# Altium PCB SiliconeSubstance.PcbDoc
Units mm, origin at the board's own origin, x right, y up, seen from the top; angles counter-clockwise.
Board outline 53.34 x 68.58 mm, 2 copper layers (Top Layer, Bottom Layer); 33 components, 38 nets, 155 pads, 13 vias.
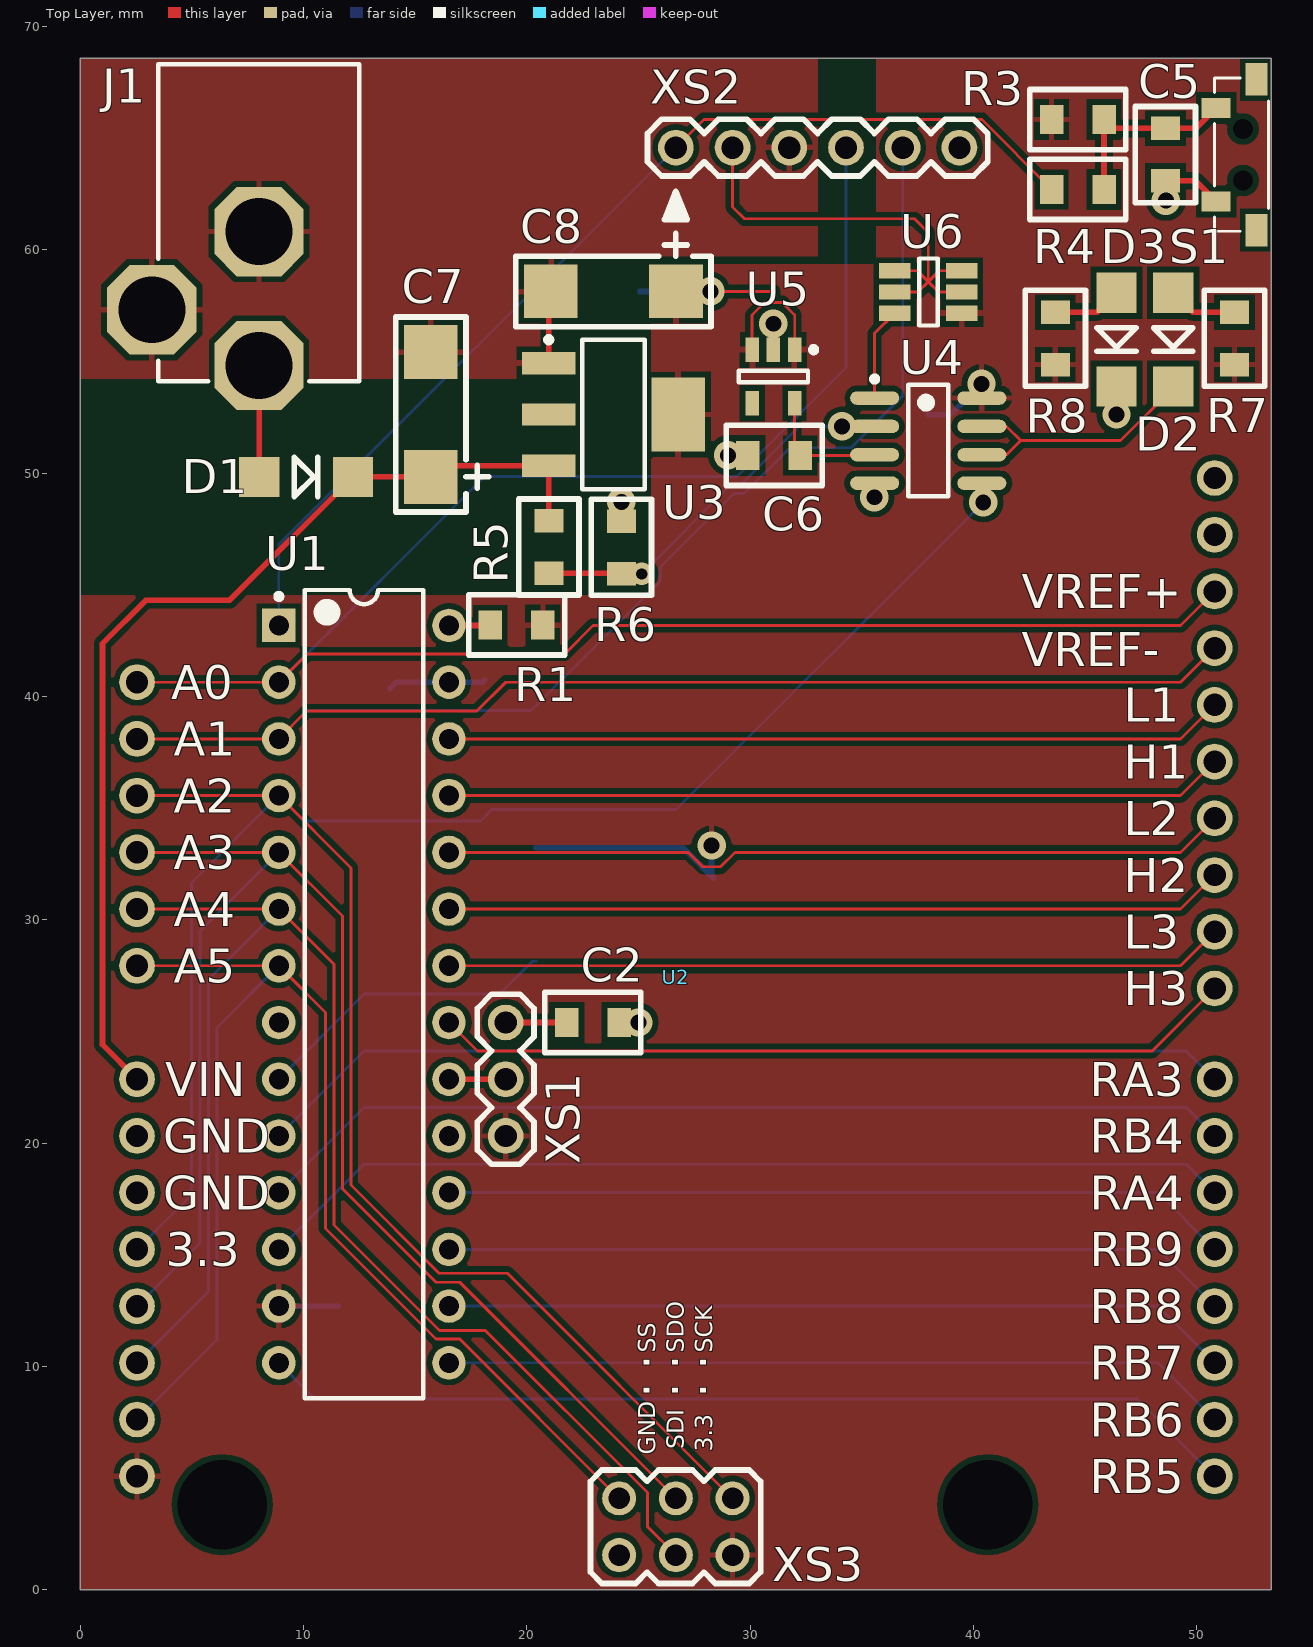
[diagram p0: Top Layer view]
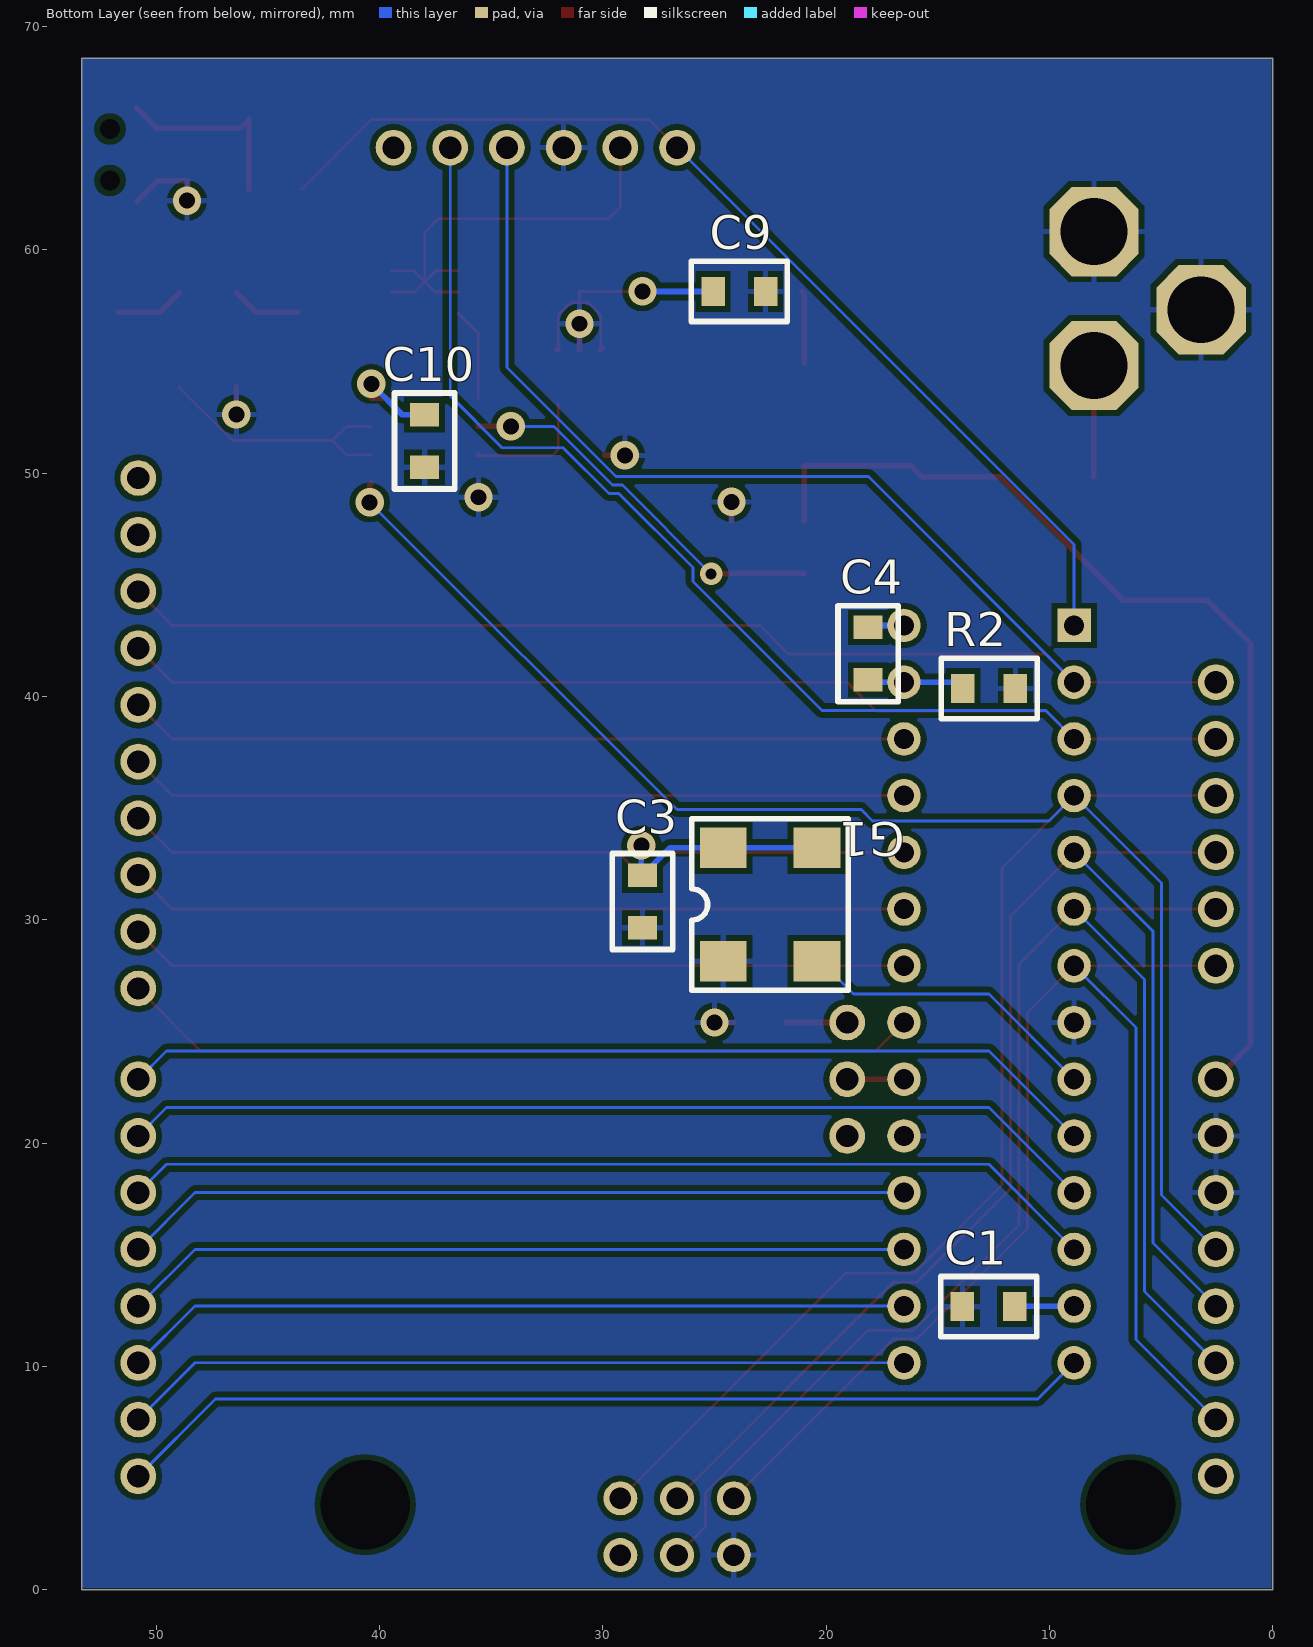
[diagram p1: Bottom Layer view, seen from below]

## Layer stack, top to bottom
Top Solder: solder mask 0.0102, Solder Resist, Dk 3.5
Top Layer: signal copper 0.0356
Dielectric 1: dielectric 0.32, FR-4, Dk 4.8
Bottom Layer: signal copper 0.0356
Bottom Solder: solder mask 0.0102, Solder Resist, Dk 3.5

## Board outline
0,0 53.34,0 53.34,68.58 0,68.58

## Design rules (kind name [scope] priority, off if disabled: settings)
Clearance [All] p1: gap=0.254
HoleSize [All] p1: absolutevalues=TRUE maxlimit=4 minlimit=0.025 maxpercent=80.000 minpercent=20.000
PolygonConnect [All] p1: connectstyle=Relief reliefconductorwidth=0.254 reliefentries=4 polygonreliefangle="90 Angle" airgapwidth=0.254
RoutingVias [All] p1: holewidth=0.711 width=1.27 viastyle="Through Hole" minholewidth=0.711 minwidth=1.27 maxholewidth=0.711 maxwidth=1.27
SolderMaskExpansion [All] p1: expansion=0.102
Width [All] p1: maxlimit=0.254 minlimit=0.127 preferedwidth=0.254
29 further rules are at their usual default settings.

## Classes and differential pairs
component class Sheet0: C1 C2 C3 C4 C5 G1 R1 R2 R3 R4 S1 U1 U2 XS1 XS2 XS3
component class Sheet1: C6 C7 C8 C9 C10 D1 D2 D3 J1 R5 R6 R7 R8 U3 U4 U5 U6

## Components (designator, comment, footprint, x,y, rotation, side; value= is the part's Value field where it differs from the comment)
C1 "Cap" 0805 13.894,12.675 r180 bottom
C2 "Cap" 0805 24.13,25.4 r180 top
C3 "Cap" 0805 28.219,29.642 r90 bottom
C4 "Cap" 0805 18.11,40.742 r90 bottom
C5 "Cap" 0805 48.59,63.094 r90 top
C6 "Cap" 0805 29.896,50.8 r0 top
C7 "CapPol" "CASE C" 15.697,52.629 r90 top
C8 "CapPol" "CASE C" 23.876,58.141 r180 top
C9 "Cap" 0805 22.708,58.141 r0 bottom
C10 "Cap" 0805 37.973,50.267 r90 bottom
D1 "US1x" "D0-214AC (SMA)" 10.109,49.835 r0 top
D2 "US1x" "D0-214AC (SMA)" 48.946,55.982 r270 top
D3 "US1x" "D0-214AC (SMA)" 46.406,55.982 r270 top
G1 "SG-8002" SMD7050 22.504,30.683 r270 bottom
J1 "PWR2.5" KLD-0202 8,68.32 r270 top locked
R1 "Res" 0805 18.364,43.205 r0 top
R2 "Res" 0805 13.868,40.361 r180 bottom
R3 "Res" 0805 45.847,65.837 r180 top
R4 "Res" 0805 43.497,62.713 r0 top
R5 "Res" 0805 20.98,45.517 r90 top
R6 "Res" 0805 24.232,47.854 r270 top
R7 "Res" 0805 51.689,54.864 r90 top
R8 "Res" 0805 43.663,54.864 r90 top
S1 "IT-1188E" IT-1188E 52.07,64.262 r90 top
U1 "DSPIC33FJ12MC202-I/SP" SPDIP300-SP28 12.7,26.67 r0 top locked
U2 "Applino N1" N1 2.54,40.64 r0 top locked
U3 "LM1117IMPX-3.3/NOPB" MP04A_N 23.876,52.629 r0 top
U4 "LMV358M" M08A_N 37.973,51.46 r0 top
U5 "LP2985-2.5DBVR" TI-DBV5_N 31.039,54.331 r270 top
U6 "IRLMS6702PbF" SuperSOT-6 37.973,58.115 r0 top
XS1 "PLS-3" PLS-3 19.05,20.32 r90 top locked
XS2 "PLS-6" PLS-6 26.67,64.58 r0 top locked
XS3 "PBD-6" PBD-6 26.67,2.819 r270 top

## Footprints (in the part's own frame and the unit in brackets; to place one, negate y for a bottom-side part, rotate by r counter-clockwise, add the part's x,y. Pads: shape width x height; smd on the part's side, far side on the other; paste and mask are expansions set on the pad)
0805 [mm]
  rect 1.05x1.3 smd: 1(0,0) 2(2.35,0)
  silkscreen extent -0.97,-1.35 3.32,1.35
"CASE C" [mm]
  rect 2.4x2.4 smd: 1(-2.8,0) 2(2.8,0)
  silkscreen extent -4.37,-2.59 4.37,1.57
"D0-214AC (SMA)" [mm]
  rect 1.8x1.8 smd: 1(-2.1,0) 2(2.1,0)
  silkscreen extent -0.52,-0.87 0.53,0.87
IT-1188E [mm]
  rect 0.9x1.3 smd: 1(-2.1,1.2) 2(2.1,1.2)
  rect 1.45x1 smd: 3(-3.375,-0.6) 4(3.375,-0.6)
  round 0 hole 0.9: 5(-1.15,0) 6(1.15,0)
  silkscreen extent -3.43,-1.14 3.43,1.27, body extent -3.9,-2.22 3.9,1.38, height 3.5
KLD-0202 [mm] "DC Power Jack, 2.5mm, KLD Series, PCB Mount"
  oct 4x4 hole 3: 1(13.5,0) 2(7.5,0) 3(11,-4.8)
  silkscreen extent 0,-4.5 14.2,4.5
M08A_N [mm] "SOIC, 8-Leads, Body 4.9x3.9mm, Pitch 1.27mm, IPC Medium Density"
  oval 2.2x0.6 smd: 1(-2.4,1.905) 2(-2.4,0.635) 3(-2.4,-0.635) 4(-2.4,-1.905) 5(2.4,-1.905) 6(2.4,-0.635) 7(2.4,0.635) 8(2.4,1.905)
  silkscreen extent -2.52,-2.5 0.9,2.88, body extent -2,-2.5 2,2.5, height 1.75
MP04A_N [mm] "SOT223, 4-Leads, Body 6.5x3.5mm, Pitch 2.3mm, Lead Span 7mm, IPC Medium Density"
  rect 2.4x1 smd: 1(-2.9,2.3) 2(-2.9,0) 3(-2.9,-2.3)
  rect 2.4x3.3 smd: 4(2.9,0)
  silkscreen extent -3.02,-3.35 1.4,3.47, body extent -1.86,-3.35 1.86,3.35, height 1.8
N1 [mm]
  round 1.6 hole 1: 1(0,0) 2(0,-2.54) 3(0,-5.08) 4(0,-7.62) 5(0,-10.16) 6(0,-12.7) 7(0,-17.78) 8(0,-20.32) 9(0,-22.86) 10(0,-25.4) 11(0,-27.94) 12(0,-30.48) 13(0,-33.02) 14(0,-35.56) 15(48.26,-35.56) 16(48.26,-33.02) 17(48.26,-30.48) 18(48.26,-27.94) 19(48.26,-25.4) 20(48.26,-22.86) 21(48.26,-20.32) 22(48.26,-17.78) 23(48.26,-13.716) 24(48.26,-11.176) 25(48.26,-8.636) 26(48.26,-6.096) 27(48.26,-3.556) 28(48.26,-1.016) 29(48.26,1.524) 30(48.26,4.064) 31(48.26,6.604) 32(48.26,9.144)
PBD-6 [mil]
  round 60 hole 37.99: 1(-50,100) 2(50,100) 3(-50,0) 4(50,0) 5(-50,-100) 6(50,-100)
  silkscreen extent -100,-151 100,149
PLS-3 [mm]
  round 1.6 hole 1: 1(0,0) 2(2.54,0) 3(5.08,0)
  silkscreen extent -1.27,-1.27 6.35,1.27
PLS-6 [mm]
  round 1.6 hole 1: 1(0,0) 2(2.54,0) 3(5.08,0) 4(7.62,0) 5(10.16,0) 6(12.7,0)
  silkscreen extent -1.27,-3.22 13.97,1.27
SMD7050 [mm]
  rect 1.8x2.1 smd: 1(-2.54,-2.1) 2(2.54,-2.1) 3(2.54,2.1) 4(-2.54,2.1)
  silkscreen extent -3.85,-3.5 3.84,3.5
SPDIP300-SP28 [mm] "DIP, 28-Leads, Row Spacing 7.62mm, Pitch 2.54mm, Body 34.9x6.8mm"
  rect 1.5x1.5 hole 0.9: 1(-3.81,16.51)
  round 1.5 hole 0.9: 2(-3.81,13.97) 3(-3.81,11.43) 4(-3.81,8.89) 5(-3.81,6.35) 6(-3.81,3.81) 7(-3.81,1.27) 8(-3.81,-1.27) 9(-3.81,-3.81) 10(-3.81,-6.35) 11(-3.81,-8.89) 12(-3.81,-11.43) 13(-3.81,-13.97) 14(-3.81,-16.51) 15(3.81,-16.51) 16(3.81,-13.97) 17(3.81,-11.43) 18(3.81,-8.89) 19(3.81,-6.35) 20(3.81,-3.81) 21(3.81,-1.27) 22(3.81,1.27) 23(3.81,3.81) 24(3.81,6.35) 25(3.81,8.89) 26(3.81,11.43) 27(3.81,13.97) 28(3.81,16.51)
  silkscreen extent -3.93,-18.1 2.65,18.1, body extent -3.55,-18.1 3.55,18.1, height 5.33
SuperSOT-6 [mm]
  rect 1.4x0.69 smd: 1(-1.5,0.95) 2(-1.5,0) 3(-1.5,-0.95) 4(1.5,-0.95) 5(1.5,0) 6(1.5,0.95)
  silkscreen extent -0.4,-1.5 0.43,1.5, body extent -0.95,-1.6 0.95,1.6, height 2
TI-DBV5_N [mm] "SOT23, 5-Leads, Body 2.9x1.6mm, Pitch 0.95mm, IPC Medium Density"
  rect 1.1x0.6 smd: 1(-1.2,0.95) 2(-1.2,0) 3(-1.2,-0.95) 4(1.2,-0.95) 5(1.2,0.95)
  silkscreen extent -1.32,-1.55 0.25,1.93, body extent -0.87,-1.52 0.87,1.53, height 1.45

## Part data
C7 C8: "Polarized Capacitor (Radial)"
D1 D2 D3: "Ultrafast Rectifier"
J1: "Low Voltage Power Supply Connector"
U1: "High-Performance 16-bit Digital Signal Controller, 12 KB Flash, 1 KB RAM, 28-Pin SPDIP, Industrial Temperature"
U3: "800mA Low-Dropout Linear Regulator, 4-pin SOT-223, Pb-Free"
U4: "General Purpose, Low Voltage, Rail-to-Rail Output Operational Amplifiers, 8-pin Narrow SOIC"
U5: library part LP2985-10DBVR, "Single Output Low Noise LDO, 150 mA, Fixed 10 V Output, 2.2 to 16 V Input, with Low IQ, 5-pin SOT-23 (DBV), -40 to 125 degC, Green (RoHS & no Sb/Br)"

## Free pads (board coordinates)
  round 3 hole 4: 4(6.35,3.81) 5(40.64,3.81)

## Via types
v1: diameter 1.27, hole 0.711, Top Layer to Bottom Layer, 12 vias
v2: diameter 1, hole 0.5, Top Layer to Bottom Layer, 1 vias

## Nets (pads, with @x,y where several pads share a name; then routed paths per layer and width w, separated by ;. In a path a pad name is that pad's centre, name@x,y a point inside that pad or via, vN(x,y) a via of type N, cw(c..) or ccw(c..) an arc to the next point about the centre after c; other vN are vias at no path point)
+2.5V: C6.2 U4.3 U5.5 | length 5.8
  Top Layer w0.127: U5.5 31.989,51.057 C6.2 U4.3@35.548,50.8
  Top Layer w0.254: U4.3@35.548,50.8 U4.3
+3.3V: C1.2 C3.2 C8.1 C9.2 C10.2 G1.1 G1.4 R1.2 R3.2 R7.1 R8.1 U1.13 U2.14 U3.4 U4.8 U5.1 U5.3 U6.4 XS1.1 XS3.2 | length 29
  Top Layer w0.127: v1(28.219,58.141) 31.039,58.141 31.039,57.709 ; U5.3 30.086,55.533 30.086,57.087 30.644,57.645 31.433,57.645 31.991,57.087 31.991,55.533 U5.1
  Top Layer w0.254: U5.3@30.023,55.597 U5.3@30.086,55.533 ; U5.1 U5.1@32.055,55.531 ; U4.8@39.694,53.365 U4.8@40.361,53.365 ; v1(40.361,54) 40.373,53.988 U4.8
  Bottom Layer w0.254: U1.13 C1.2@11.544,12.7 ; G1.4 G1.1 26.988,33.223 28.346,31.865 28.372,31.89 28.27,31.992 v1(28.27,33.325) ; C9.2 v1(28.219,58.141) ; C10.2 38.977,52.617 v1(40.361,54)
+9.0V: D1.1 J1.1 | length 5
  Top Layer w0.254: J1.1 8.009,54.811 D1.1
GND: C1.1 C2.1 C3.1 C5.1 C6.1 C7.2 C8.2 C9.1 C10.1 D3.2 G1.2 J1.2 J1.3 R2.2 R6.1 S1.1 U1.8 U1.19 U2.8 U2.9 U3.1 U4.4 U5.2 XS2.3 XS3.6 | length 13.8
  Top Layer w0.254: J1.2@6.7,60.82 J1.2 J1.2@8.024,60.796 ; U3.1 20.976,58.041 C8.2 ; C2.1 v1(24.994,25.4) ; R6.1 v1(24.232,48.717) ; v1(29.007,50.8) C6.1 ; U5.2 v1(31.039,56.693) ; v1(35.56,48.92) 35.573,48.933 U4.4 ; v1(46.406,52.629) D3.2 ; v1(48.616,62.205) 48.59,62.23 C5.1 49.938,63.094 S1.1
NetC2_2: C2.2 XS1.3 | length 2.7
  Top Layer w0.254: XS1.3 C2.2
NetC4_1: C4.1 R2.1 U1.27 | length 4.4
  Bottom Layer w0.254: R2.1 14.148,40.64 U1.27 18.009,40.64 C4.1
NetC4_2: C4.2 R1.1 U1.28 | length 3.5
  Top Layer w0.254: U1.28 18.339,43.18 R1.1
  Bottom Layer w0.254: U1.28 18.022,43.18 C4.2
NetC5_2: C5.2 R3.1 R4.2 S1.2 | length 8.7
  Top Layer w0.254: R4.2 R3.1 46.24,65.444 C5.2 49.952,65.444 S1.2
NetD2_1: D2.1 R7.2 | length 3.1
  Top Layer w0.254: D2.1 49.813,57.214 R7.2
NetD2_2: D2.2 U4.6 U4.7 | length 11.9
  Top Layer w0.127: U4.6 41.478,50.825 42.113,51.46 ; U4.7 41.478,52.095 42.113,51.46 ; D2.2 48.946,53.822 46.584,51.46 42.113,51.46
NetD3_1: D3.1 R8.2 | length 3.1
  Top Layer w0.254: R8.2 45.538,57.214 D3.1
NetG1_3: G1.3 U1.9 | length 13.7
  Bottom Layer w0.127: U1.9 12.7,26.67 18.771,26.67 20.244,28.143 G1.3
NetR4_1: R4.1 U1.1 XS2.1 | length 47.4
  Top Layer w0.127: XS2.1 27.927,65.837 40.373,65.837 R4.1
  Bottom Layer w0.127: U1.1 8.89,46.8 XS2.1
NetR5_1: R5.1 R6.2 U4.2 | length 17.3
  Top Layer w0.254: R5.1 24.218,45.517 R6.2 25.134,45.504 v2(25.146,45.491) ; v1(34.112,52.095) U4.2
  Bottom Layer w0.127: v2(25.146,45.491) 29.121,49.466 29.559,49.466 32.188,52.095 v1(34.112,52.095)
NetU1_2: U1.2 U2.1 U2.30 XS2.4 | length 91
  Top Layer w0.127: U2.1 U1.2 10.16,41.91 21.692,41.91 22.962,43.18 49.276,43.18 U2.30
  Bottom Layer w0.127: U1.2 18.098,49.847 29.401,49.847 34.29,54.736 XS2.4
NetU1_3: U1.3 U2.2 U2.29 XS2.5 | length 95.8
  Top Layer w0.127: U2.2 U1.3 10.135,39.345 17.755,39.345 19.05,40.64 49.276,40.64 U2.29 U2.29@50.8,42.112
  Bottom Layer w0.127: U1.3 10.16,39.37 20.181,39.37 25.964,45.153 25.964,45.77 29.279,49.085 29.717,49.085 31.774,51.143 34.507,51.143 36.83,53.466 XS2.5
NetU1_4: U1.4 U2.3 U2.10 U4.5 XS3.1 | length 109.8
  Top Layer w0.127: U2.3 U1.4 12.124,32.326 12.124,18.116 16.068,14.172 19.127,14.172 XS3.1
  Top Layer w0.254: U4.5 40.437,49.492 v1(40.437,48.692)
  Bottom Layer w0.127: U2.10 4.978,17.678 4.978,31.648 U1.4 10.021,34.429 17.919,34.429 18.422,34.932 26.677,34.932 v1(40.437,48.692)
NetU1_5: U1.5 U2.4 U2.11 XS3.3 | length 66.2
  Top Layer w0.127: U2.4 U1.5 11.743,30.167 11.743,17.959 15.934,13.768 16.992,13.768 XS3.3
  Bottom Layer w0.127: U2.11 5.359,15.519 5.359,29.489 U1.5
NetU1_6: U1.6 U2.5 U2.12 XS3.4 | length 66.8
  Top Layer w0.127: U2.5 U1.6 11.362,28.008 11.362,16.338 16.092,11.609 18.138,11.609 25.4,4.346 25.4,2.819 XS3.4
  Bottom Layer w0.127: U2.12 5.74,13.36 5.74,27.33 U1.6
NetU1_7: U1.7 U2.6 U2.13 XS3.5 | length 60.1
  Top Layer w0.127: U2.6 U1.7 10.981,25.849 10.981,16.181 15.934,11.228 16.992,11.228 XS3.5
  Bottom Layer w0.127: U2.13 6.121,11.201 6.121,25.171 U1.7
NetU1_10: U1.10 U2.22 | length 44
  Bottom Layer w0.127: U1.10 12.7,24.13 49.53,24.13 U2.22
NetU1_11: U1.11 U2.21 | length 44
  Bottom Layer w0.127: U1.11 12.7,21.59 49.53,21.59 U2.21
NetU1_12: U1.12 U2.20 | length 44
  Bottom Layer w0.127: U1.12 12.7,19.05 49.53,19.05 U2.20
NetU1_14: U1.14 U2.15 | length 44
  Bottom Layer w0.127: U1.14 10.516,8.534 47.346,8.534 U2.15
NetU1_15: U1.15 U2.16 | length 35.3
  Bottom Layer w0.127: U1.15 48.26,10.16 U2.16
NetU1_16: U1.16 U2.17 | length 35.3
  Bottom Layer w0.127: U1.16 48.26,12.7 U2.17
NetU1_17: U1.17 U2.18 | length 35.3
  Bottom Layer w0.127: U1.17 48.26,15.24 U2.18
NetU1_18: U1.18 U2.19 | length 35.3
  Bottom Layer w0.127: U1.18 48.26,17.78 U2.19
NetU1_20: U1.20 XS1.2 | length 2.5
  Top Layer w0.254: U1.20 XS1.2
NetU1_21: U1.21 U2.23 | length 36
  Top Layer w0.127: U1.21 17.78,24.13 48.006,24.13 U2.23
NetU1_22: U1.22 U2.24 | length 34.9
  Top Layer w0.127: U1.22 49.276,27.94 U2.24
NetU1_23: U1.23 U2.25 | length 34.9
  Top Layer w0.127: U1.23 49.276,30.48 U2.25
NetU1_24: U1.24 U2.26 | length 35.5
  Top Layer w0.127: U1.24 27.228,33.02 27.876,32.372 28.665,32.372 29.312,33.02 49.276,33.02 U2.26
NetU1_25: U1.25 U2.27 | length 34.9
  Top Layer w0.127: U1.25 49.276,35.56 U2.27
NetU1_26: U1.26 U2.28 | length 34.9
  Top Layer w0.127: U1.26 49.276,38.1 U2.28
NetU4_1: U4.1 U6.3 | length 4.2
  Top Layer w0.127: U4.1 35.573,56.265 U6.3
NetU6_1: U6.1 U6.2 U6.5 U6.6 XS2.2 | length 20.9
  Top Layer w0.127: XS2.2@29.21,64.287 29.21,61.925 29.743,61.392 37.363,61.392 37.973,60.782 37.973,58.572 ; U6.2 37.516,58.115 37.973,58.572 ; U6.1 37.48,59.065 37.973,58.572 ; U6.5 38.43,58.115 37.973,58.572 ; U6.6 38.466,59.065 37.973,58.572
  Top Layer w0.254: XS2.2@29.21,64.287 XS2.2
VIN: C7.1 D1.2 R5.2 U2.7 U3.3 | length 45.9
  Top Layer w0.254: U2.7 0.991,24.409 0.991,42.367 2.934,44.311 6.685,44.311 D1.2 15.691,49.835 C7.1 16.197,50.329 U3.3 20.976,47.871 R5.2
pads on no net: S1.3 S1.4 S1.5 S1.6 U2.31 U2.32 U3.2 U5.4 XS2.6

## Polygon pours and split planes (outlines as drawn)
GND on Top Layer "TOPGND" (solid, pour order 0): 0,68.58 0,54.229 3.607,54.229 10.287,54.229 14.605,54.229 22.276,54.229 22.276,55.855 22.276,59.715 33.02,59.715 33.02,68.58
+3.3V on Top Layer "TOP+3.3V" (solid, pour order 4): 25.578,50.978 25.578,59.334 25.603,59.36 35.636,59.36 35.636,68.58 53.34,68.58 53.34,48.412 53.34,48.489 53.34,0 0,0 0,44.526 25.603,44.526
GND on Bottom Layer "BTN+3.3V" (solid, pour order 2): 0,68.58 0.051,68.529 0.051,0.076 53.264,0.076 53.34,0.152 53.34,68.58

## Silkscreen, mask and mechanical layers (free items; w line width, h text height)
Top Overlay:
  text "VREF+" at 42.164,43.942 h1.52
  text "VREF-" at 42.164,41.351 h1.52
  text "A0" at 4.064,39.878 h1.52
  text "L1" at 46.736,38.862 h1.52
  text "A1" at 4.191,37.338 h1.52
  text "H1" at 46.736,36.322 h1.52
  text "A2" at 4.191,34.798 h1.52
  text "L2" at 46.736,33.782 h1.52
  text "A3" at 4.191,32.258 h1.52
  text "H2" at 46.736,31.242 h1.52
  text "A4" at 4.191,29.718 h1.52
  text "L3" at 46.736,28.702 h1.52
  text "A5" at 4.191,27.178 h1.52
  text "H3" at 46.736,26.162 h1.52
  text "VIN" at 3.81,22.098 h1.52
  text "RA3" at 45.212,22.098 h1.52
  text "GND" at 3.708,19.558 h1.52
  text "RB4" at 45.212,19.558 h1.52
  text "GND" at 3.708,17.018 h1.52
  text "RA4" at 45.212,17.018 h1.52
  text "3.3" at 3.835,14.478 h1.52
  text "RB9" at 45.212,14.478 h1.52
  text "RB8" at 45.212,11.938 h1.52
  text "SS" at 25.756,10.617 h0.76 r90
  text "SDO" at 27.026,10.617 h0.76 r90
  text "SCK" at 28.296,10.617 h0.76 r90
  text "." at 25.502,9.855 h1.52 r90
  text "." at 26.772,9.855 h1.52 r90
  text "." at 28.042,9.855 h1.52 r90
  text "RB7" at 45.212,9.398 h1.52
  text "." at 25.502,8.585 h1.52 r90
  text "." at 26.772,8.585 h1.52 r90
  text "." at 28.042,8.585 h1.52 r90
  text "RB6" at 45.212,6.858 h1.52
  text "SDI" at 27.026,6.299 h0.76 r90
  text "3.3" at 28.296,6.172 h0.76 r90
  text "GND" at 25.756,6.045 h0.76 r90
  text "RB5" at 45.212,4.318 h1.52
Mechanical 1:
  the board outline again, w0.254

## Dimensions
53.34,68.58 to 53.34,0 on Mechanical 4
0,68.58 to 53.34,68.58 on Mechanical 4